# EAGLE board l (EAGLE 7.2.0)
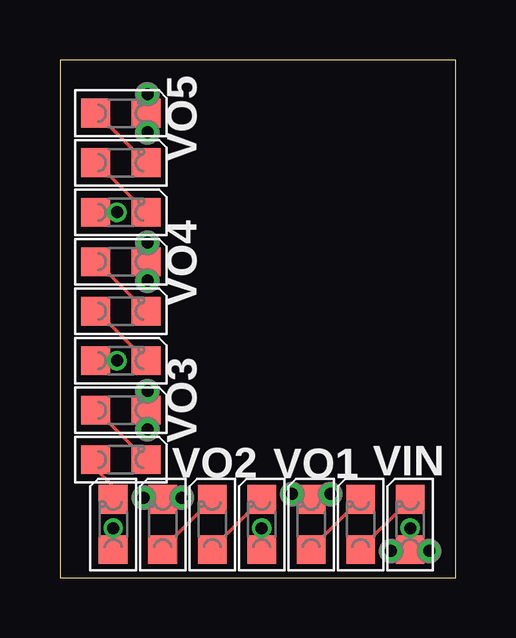
[diagram p0: board, top side]
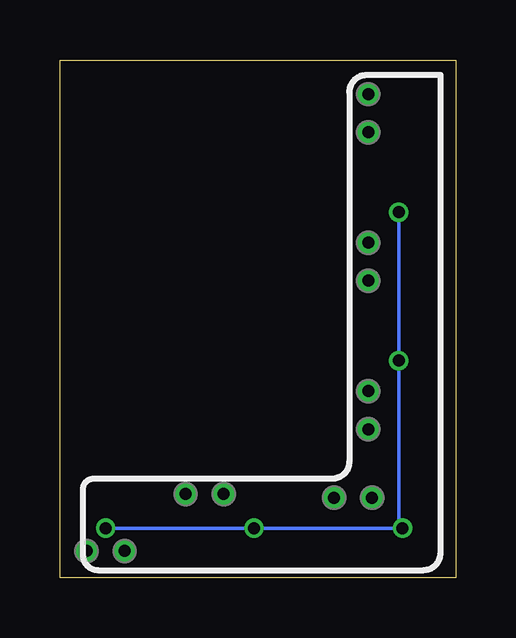
[diagram p1: board, bottom side, seen from below]

Size 16.51 x 21.59 mm. Coordinates in mm from the lower left corner, seen from the top.
Outline: 0,0 16.51,0 16.51,21.59 0,21.59 0,0
Copper layers (1*16): Top 0.035mm / dielectric 1.5mm / Bottom 0.035mm
Design rules "Fusion_eagle_rule_v1.1_tms *": minimum track width 6mil, minimum drill 12mil, track to track 6mil, track to pad 6mil, pad to pad 6mil, via to via 6mil, smd to smd 0mil, copper to edge 10mil, drill to drill 10mil, minimum pad ring 10mil, minimum via ring 6mil, stop-mask expansion 2mil, vias tented up to drill 100mil, thermal gap 10mil

## Footprints (pad centres in the part's own frame; a part is rotated, then mirrored left to right if it is on the bottom)
LED_0805 = smd 1.2 x 1.2: A 0,-1.05; C 0,1.05
P1-20 = drill 0.5: TP 0,0

## Placement (x,y rotation side)
LED1  [LED_0805]  14.61,2.22 0 top
LED2  [LED_0805]  12.54,2.22 0 top
LED3  [LED_0805]  10.48,2.22 0 top
LED4  [LED_0805]  8.41,2.22 0 top
LED5  [LED_0805]  6.35,2.22 0 top
LED6  [LED_0805]  4.29,2.22 0 top
LED7  [LED_0805]  2.22,2.22 0 top
LED8  [LED_0805]  2.54,4.92 270 top
LED9  [LED_0805]  2.54,6.99 270 top
LED10  [LED_0805]  2.54,9.05 270 top
LED11  [LED_0805]  2.54,11.11 270 top
LED12  [LED_0805]  2.54,13.18 270 top
LED13  [LED_0805]  2.54,15.24 270 top
LED14  [LED_0805]  2.54,17.3 270 top
LED15  [LED_0805]  2.54,19.37 270 top
VIN  [P1-20]  15.4,1.11 0 top
VIN1  [P1-20]  13.81,1.11 0 top
VO1  [P1-20]  9.68,3.49 0 top
VO2  [P1-20]  3.49,3.33 0 top
VO3  [P1-20]  3.65,7.78 0 top
VO4  [P1-20]  3.65,13.97 0 top
VO5  [P1-20]  3.65,18.57 0 top
VO6  [P1-20]  11.27,3.49 0 top
VO7  [P1-20]  5.08,3.33 0 top
VO8  [P1-20]  3.65,6.19 0 top
VO9  [P1-20]  3.65,12.38 0 top
VO10  [P1-20]  3.65,20.16 0 top

## Library data of the parts
LED1-LED15 VIN VIN1 VO1-VO10 = CyberRailGuru

## Nets
N$3: LED2.C LED3.A
N$4: LED1.C LED2.A
N$7: LED5.C LED6.A
N$8: LED4.C LED5.A
N$11: LED8.C LED9.A
N$12: LED7.C LED8.A
N$15: LED11.C LED12.A
N$16: LED10.C LED11.A
N$19: LED14.C LED15.A
N$20: LED13.C LED14.A
VIN: LED1.A LED4.A LED7.A LED10.A LED13.A VIN1.TP VIN.TP
VOUT1: LED3.C VO1.TP VO6.TP
VOUT2: LED6.C VO2.TP VO7.TP
VOUT3: LED9.C VO3.TP VO8.TP
VOUT4: LED12.C VO4.TP VO9.TP
VOUT5: LED15.C VO5.TP VO10.TP

## Tracks (layer width: path | path; a pad name or v marks a point on that pad's centre or on a via)
N$3
  Top 0.152: LED3.A 10.48,1.21 LED2.C
N$4
  Top 0.152: LED2.A 12.54,1.21 LED1.C
N$7
  Top 0.152: LED6.A 4.29,1.21 LED5.C
N$8
  Top 0.152: LED5.A 6.35,1.21 LED4.C
N$11
  Top 0.152: LED9.A 1.53,6.99 LED8.C
N$12
  Top 0.152: LED8.A 1.49,4.54 2.22,3.81 LED7.C
N$15
  Top 0.152: LED12.A 1.53,13.18 LED11.C
N$16
  Top 0.152: LED11.A 1.53,11.11 LED10.C
N$19
  Top 0.152: LED15.A 1.53,19.37 LED14.C
N$20
  Top 0.152: LED14.A 1.53,17.3 LED13.C
VIN  (via drill 0.5)
  Top 0.152: VIN.TP 14.61,1.11 | VIN1.TP 14.61,1.11 | 14.61,1.11 LED1.A v14.61,2.06 | LED4.A v8.41,2.06 | LED7.A v2.22,2.06 | v2.38,15.24 LED13.A | LED10.A v2.38,9.05
  Bottom 0.152: v14.61,2.06 v8.41,2.06 v2.22,2.06 2.38,2.22 v2.38,9.05 v2.38,15.24
VOUT1
  Top 0.152: VO6.TP 10.48,3.49 | VO1.TP 10.48,3.49 | 10.48,3.49 LED3.C
VOUT2
  Top 0.152: VO7.TP 4.29,3.33 | VO2.TP 4.29,3.33 | 4.29,3.33 LED6.C
VOUT3
  Top 0.152: VO8.TP 3.59,6.19 LED9.C 3.59,7.78 VO3.TP
VOUT4
  Top 0.152: VO9.TP 3.59,12.38 LED12.C 3.59,13.97 VO4.TP
VOUT5
  Top 0.152: VO5.TP 3.59,18.57 LED15.C 3.59,20.16 VO10.TP

## Text on the board
201bmp: L